# Altium PCB EMIA_HM1521_NETLIST.pcbdoc (part 2 of 2)
Units mm, origin at the board's own origin, x right, y up, seen from the top; angles counter-clockwise.
Board outline 118 x 84.09 mm, 2 copper layers (Top Layer, Bottom Layer), stack 0.972 mm thick; 201 components, 147 nets, 642 pads, 379 vias.
Unrouted connection lines stored in the file: 1.
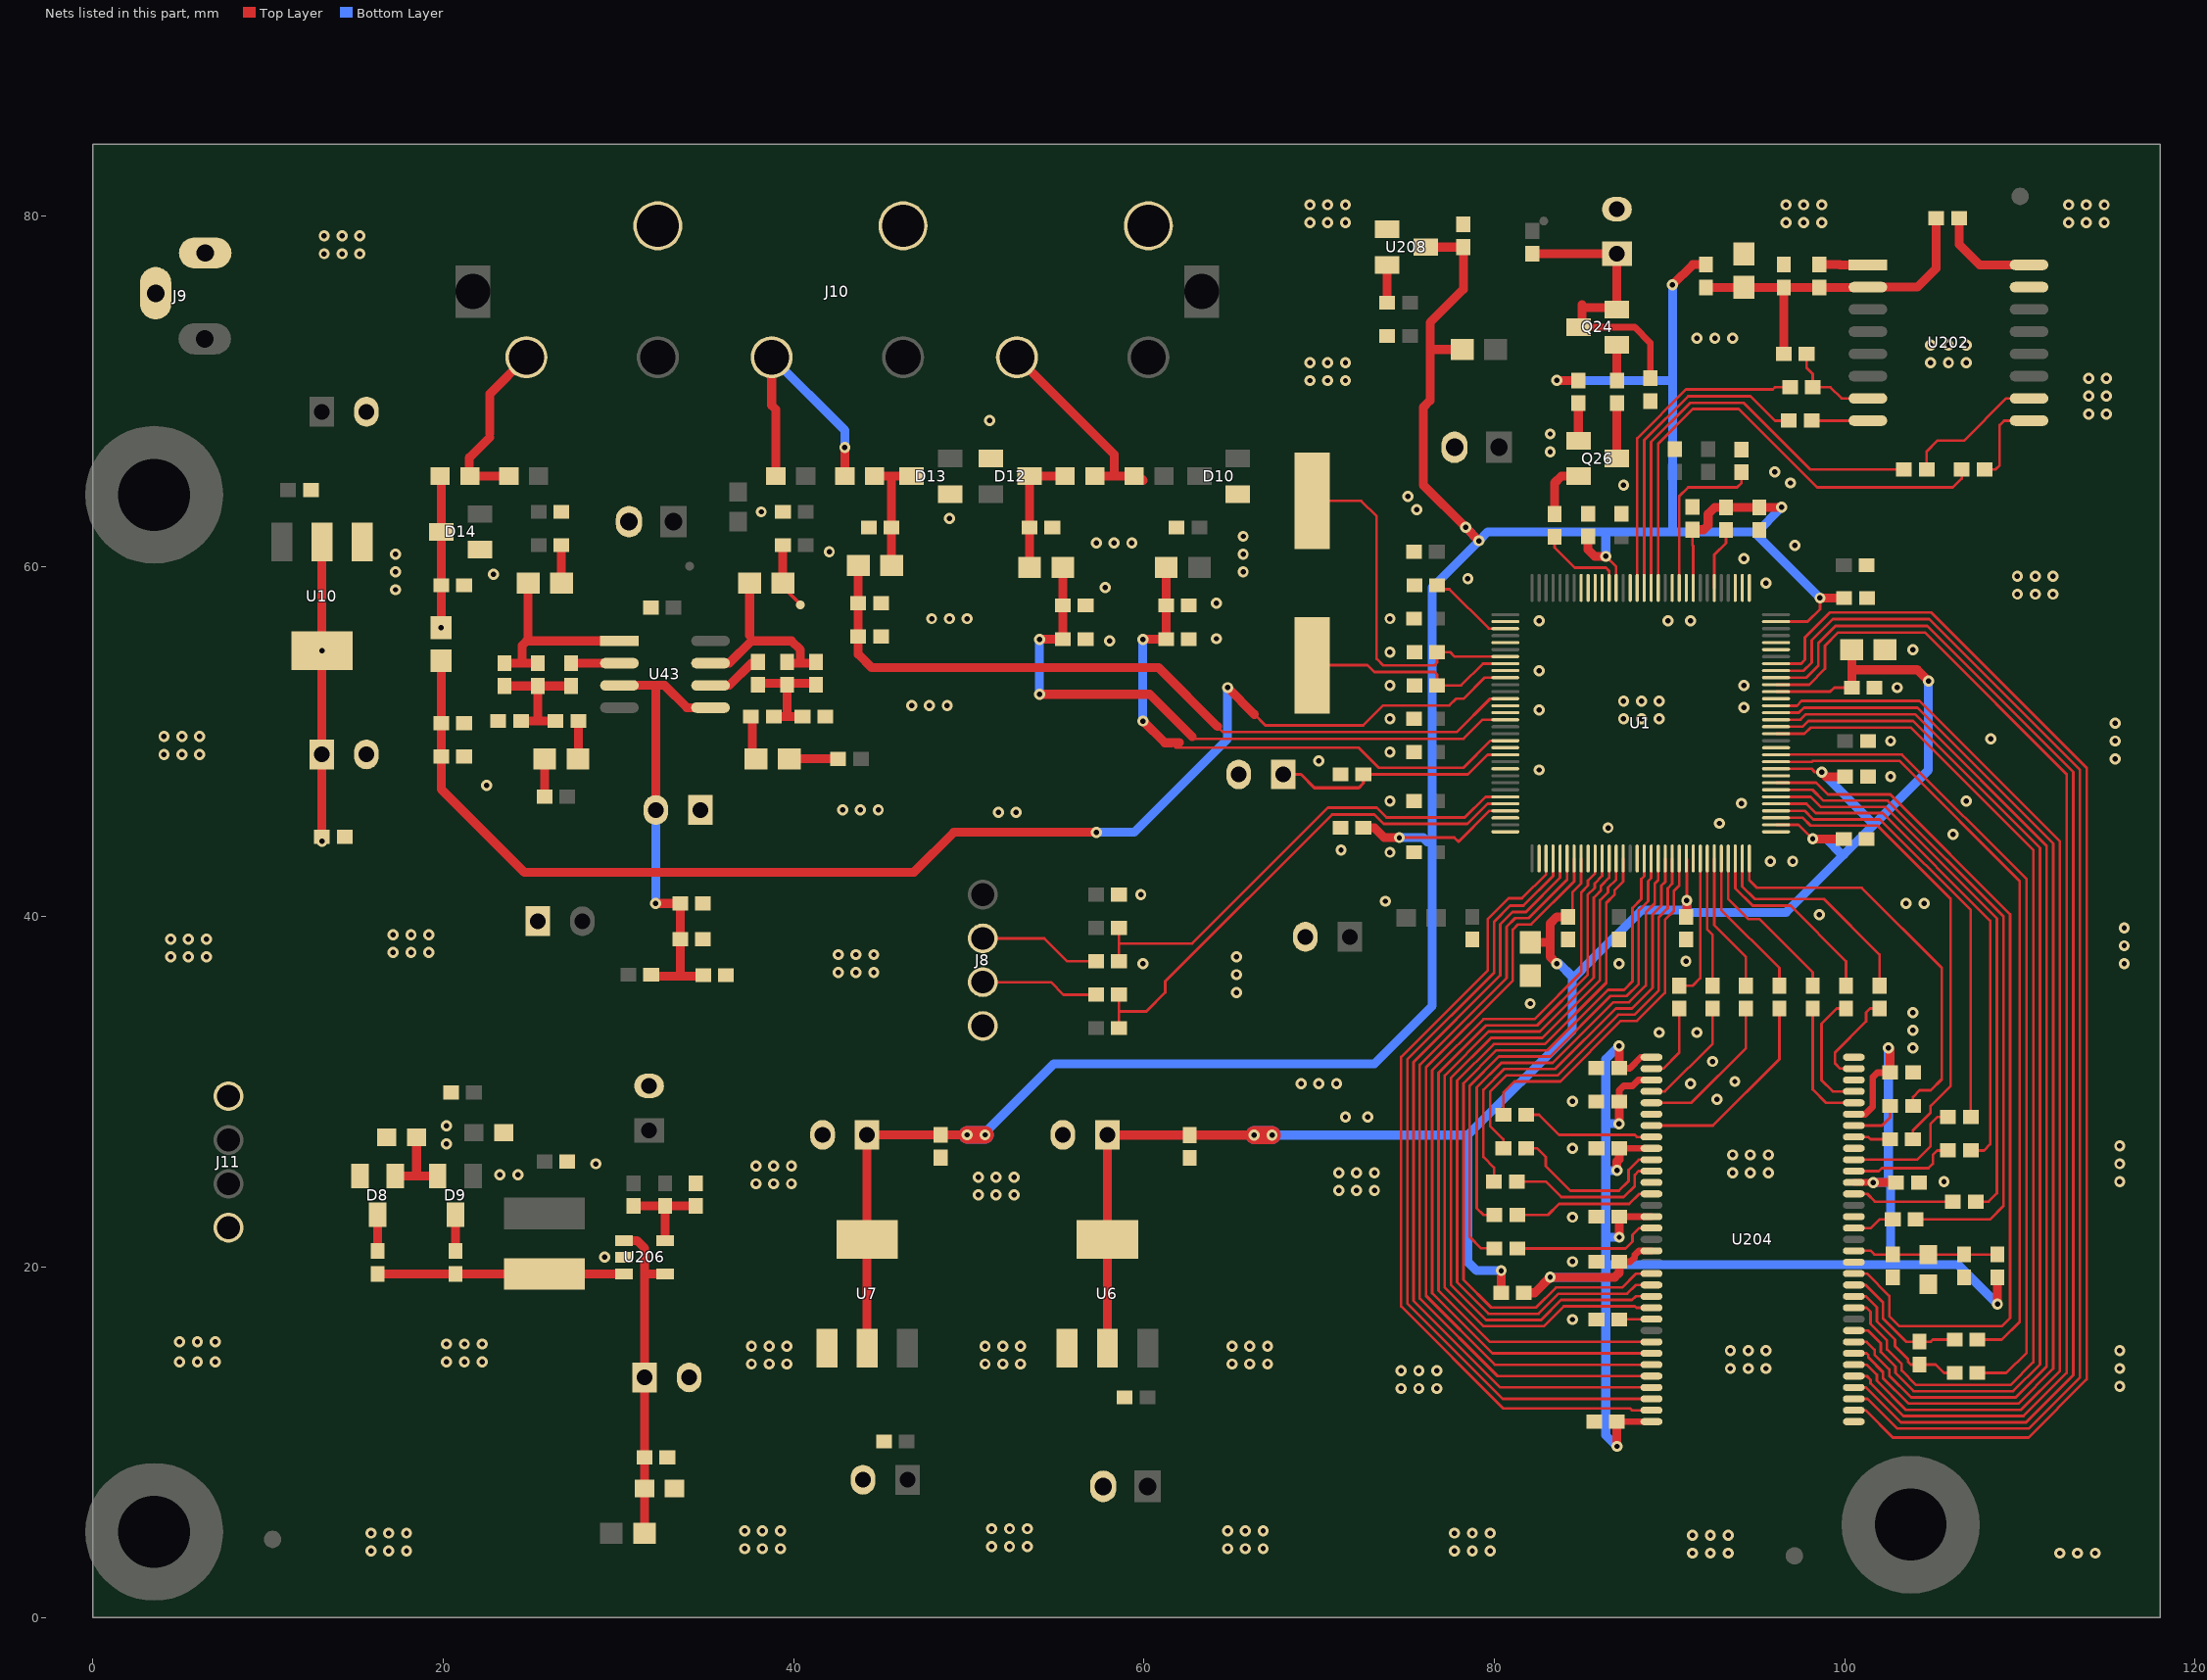
[diagram p2: the nets of this part, all layers, seen from the top]

## Via types
v1: diameter 0.635, hole 0.305, Top Layer to Bottom Layer, 379 vias

## Nets (pads, with @x,y where several pads share a name; then routed paths per layer and width w, separated by ;. In a path a pad name is that pad's centre, name@x,y a point inside that pad or via, vN(x,y) a via of type N, cw(c..) or ccw(c..) an arc to the next point about the centre after c; other vN are vias at no path point) (continued)
D2V5: C11.2 C31.2 C32.2 C33.2 C53.2 C67.2 C73.2 C1327.1 C1328.1 L18.2 U1.8 U1.23 U1.34 U1.42 U1.53 U6.2 U6.4 | length 125.4
  Top Layer w0.152: C11.2@84.455,40.137 84.455,41.402 84.951,41.898 U1.8@84.951,43.33 ; U1.23@90.951,43.33 90.982,43.299 90.982,40.946 v1(90.983,40.945) ; U1.34@96.076,45.255 97.366,45.255 v1(98.171,44.45) ; U1.42@96.076,48.455 98.103,48.455 98.298,48.26 v1(98.679,48.26) ; U1.53@96.076,52.855 99.164,52.855 99.395,53.086 C53.2@100.396,53.086
  Top Layer w0.508: U6.2@57.912,15.619 C1327.1@57.912,27.559 57.926,27.545 C1328.1@62.611,27.545 v1(66.294,27.545) ; L18.2@80.386,18.542 80.391,18.547 v1(80.391,19.812) ; C67.2@82.042,38.542 83.185,38.542 ; v1(83.566,37.338) 83.185,37.719 83.185,38.542 ; C11.2@84.201,40.01 83.571,40.01 83.185,39.624 83.185,38.542 ; C31.2@90.932,39.86 C31.2@90.932,40.01 ; C31.2@90.951,40.01 90.983,40.041 v1(90.983,40.945) ; v1(98.171,44.45) C32.2@99.944,44.45 ; v1(98.679,48.26) 98.678,48.261 v1(98.679,48.26) 98.933,48.006 C33.2@100.027,48.006 C33.2@100.071,48.006 ; C53.2@100.396,53.086 100.396,54.102 ; C73.2@100.396,55.245 100.396,54.102 ; v1(104.775,53.467) 104.14,54.102 100.396,54.102
  Top Layer w1.016: v1(66.294,27.545) v1(67.31,27.545)
  Bottom Layer w0.508: v1(67.31,27.545) 78.486,27.545 ; v1(80.391,19.812) 78.994,19.812 78.486,20.32 78.486,27.545 ; v1(83.566,37.338) 83.693,37.338 84.443,36.588 ; v1(90.983,40.945) 90.983,40.418 90.951,40.386 ; v1(98.171,44.45) 98.933,44.45 99.822,43.561 99.949,43.561 ; v1(98.679,48.26) 101.663,45.276 ; v1(104.775,53.467) 104.775,48.387 101.663,45.276 ; 78.486,27.545 84.455,33.514 84.455,36.449 85.586,37.58 88.392,40.386 90.951,40.386 ; 90.951,40.386 90.951,40.259 96.647,40.259 99.949,43.561 ; 99.949,43.561 101.663,45.276
  Bottom Layer w1.016: v1(66.294,27.545) v1(67.31,27.545)
D3V3: C30.2 C35.2 C37.2 C40.2 C46.2 C59.2 C76.1 C98.1 L8.1 L17.1 R65.2 R139.2 U1.63 U1.73 U1.84 U1.125 U7.2 U7.4 U208.3 | length 178.2
  Top Layer w0.152: v1(74.574,44.526) 77.713,44.526 77.947,44.292 79.71,46.055 U1.125@80.626,46.055 ; v1(86.36,60.579) 86.951,59.988 U1.84@86.951,58.78 ; C35.2@91.313,62.098 91.313,61.214 91.351,61.176 U1.73@91.351,58.78 ; U1.63@96.076,56.855 97.876,56.855 98.588,57.567 v1(98.588,58.202)
  Top Layer w0.508: U7.2@44.196,15.365 C98.1@44.196,27.559 C76.1@48.387,27.559 v1(49.911,27.559) ; C46.2@72.776,45.085 73.152,45.085 73.711,44.526 v1(74.574,44.526) ; U208.3@76.329,78.232 C59.2@78.232,78.232 78.232,75.819 76.327,73.914 76.327,72.39 ; L17.1@77.978,72.39 76.327,72.39 ; v1(79.121,61.468) v1(78.359,62.23) 75.946,64.643 75.946,69.088 76.327,69.469 76.327,72.39 ; v1(83.556,70.617) R139.2@84.795,70.617 ; C30.2@85.344,61.717 85.344,60.96 85.725,60.579 v1(86.36,60.579) ; v1(90.17,76.073) 91.33,77.233 L8.1@92.075,77.233 ; C35.2@91.313,62.098 91.943,62.098 92.202,62.357 92.202,62.992 92.588,63.378 R65.2@93.218,63.378 C40.2@95.123,63.378 v1(96.398,63.378) ; v1(98.588,58.202) C37.2@99.965,58.202 C37.2@100.034,58.202
  Top Layer w1.016: v1(49.911,27.559) v1(50.927,27.559)
  Bottom Layer w0.178: 86.446,61.935 86.487,61.976
  Bottom Layer w0.508: v1@50.8,27.559 54.864,31.623 73.152,31.623 76.454,34.925 76.454,44.577 ; v1(74.574,44.526) 75.935,44.526 76.169,44.292 76.454,44.577 ; v1(78.359,62.23) v1(79.121,61.468) ; v1(83.556,70.617) 90.17,70.617 ; v1(86.36,60.579) 86.36,61.976 ; v1(90.17,76.073) 90.17,70.617 ; 94.813,61.976 90.17,61.976 ; v1(96.398,63.378) 94.905,61.885 v1(98.588,58.202) ; 76.454,44.577 76.454,58.801 v1(79.121,61.468) ; v1(79.121,61.468) 79.629,61.976 86.36,61.976 ; 86.36,61.976 86.487,61.976 90.17,61.976 ; 90.17,61.976 90.17,70.617
  Bottom Layer w1.016: v1(49.911,27.559) 50.8,27.559 v1(50.927,27.559)
D3V3_T: C83.1 C104.1 U10.2 U10.4 | length 16.8
  Top Layer w0.508: C83.1@13.081,44.577 U10.2@13.081,61.343
  other v1: 13.081,44.323 13.081,55.193
DDR_A0: U1.6 U204.29 | length 44.1
  Top Layer w0.152: U1.6@84.151,43.33 84.151,42.13 81.95,39.929 81.188,39.929 80.696,39.436 80.696,36.515 75.743,31.562 75.743,18.227 80.18,13.79 U204.29@88.967,13.79
DDR_A1: U1.5 U204.30 | length 44.8
  Top Layer w0.152: U1.5@83.751,43.33 83.751,42.232 81.803,40.284 81.041,40.284 80.34,39.583 80.34,36.662 75.387,31.709 75.387,18.08 80.327,13.14 U204.30@88.967,13.14
DDR_A2: U1.4 U204.31 | length 45.5
  Top Layer w0.152: U1.4@83.351,43.33 83.351,42.335 81.656,40.64 80.894,40.64 79.985,39.731 79.985,36.81 75.032,31.857 75.032,17.932 80.474,12.49 U204.31@88.967,12.49
DDR_A3: U1.3 U204.32 | length 46.2
  Top Layer w0.152: U1.3@82.951,43.33 82.951,42.438 81.574,41.061 80.812,41.061 79.629,39.878 79.629,36.957 74.676,32.004 74.676,17.78 80.518,11.938 87.757,11.938 87.855,11.84 U204.32@88.967,11.84
DDR_A4: U1.57 U204.35 | length 73.6
  Top Layer w0.152: U1.57@96.076,54.455 97.513,54.455 97.729,54.672 97.729,55.948 99.156,57.374 104.946,57.374 113.806,48.514 113.806,13.603 110.49,10.287 102.743,10.287 101.19,11.84 U204.35@100.517,11.84
DDR_A5: U1.56 U204.36 | length 72.4
  Top Layer w0.152: U1.56@96.076,54.055 97.652,54.055 98.11,54.514 98.11,55.79 99.314,56.993 104.824,56.993 113.425,48.392 113.425,13.725 110.495,10.795 102.997,10.795 101.302,12.49 U204.36@100.517,12.49
DDR_A6: U1.55 U204.37 | length 71.3
  Top Layer w0.152: U1.55@96.076,53.655 97.812,53.655 98.491,54.334 98.491,55.632 99.472,56.612 104.702,56.612 113.044,48.27 113.044,13.847 110.348,11.151 103.197,11.151 101.208,13.14 U204.37@100.517,13.14
DDR_A7: U1.54 U204.38 | length 70.3
  Top Layer w0.152: U1.54@96.076,53.255 97.964,53.255 98.872,54.164 98.872,55.474 99.63,56.231 104.58,56.231 112.663,48.148 112.663,13.969 110.201,11.506 103.344,11.506 101.473,13.378 101.473,13.578 101.261,13.79 U204.38@100.517,13.79
DDR_A8: U1.51 U204.39 | length 63.8
  Top Layer w0.152: U1.51@96.076,52.055 97.267,52.055 97.536,52.324 104.267,52.324 112.282,44.309 112.282,14.091 110.053,11.862 103.492,11.862 101.829,13.525 101.829,13.868 101.257,14.44 U204.39@100.517,14.44
DDR_A9: U1.50 U204.40 | length 62.8
  Top Layer w0.152: U1.50@96.076,51.655 97.375,51.655 97.663,51.943 104.145,51.943 111.901,44.187 111.901,14.213 109.906,12.217 103.639,12.217 102.184,13.672 102.184,14.016 101.346,14.854 101.346,14.986 101.242,15.09 U204.40@100.517,15.09
DDR_A10: U1.7 U204.28 | length 43.4
  Top Layer w0.152: U1.7@84.551,43.33 84.551,42.026 82.098,39.573 81.356,39.573 81.051,39.268 81.051,36.368 76.098,31.415 76.098,18.374 80.033,14.44 U204.28@88.967,14.44
DDR_A11: U1.49 U204.41 | length 61.5
  Top Layer w0.152: U1.49@96.351,51.255 97.478,51.255 97.785,51.562 104.023,51.562 111.52,44.065 111.52,14.335 109.759,12.573 103.786,12.573 102.54,13.82 102.54,14.163 101.702,15.001 101.702,15.285 101.247,15.74 U204.41@100.517,15.74
DDR_A12: U1.48 U204.42 | length 60.9
  Top Layer w0.152: U1.48@96.076,50.855 97.591,50.855 97.917,51.181 103.901,51.181 111.139,43.943 111.139,14.456 109.611,12.929 103.934,12.929 102.895,13.967 102.895,14.326 102.057,15.164 102.057,15.662 101.329,16.39 U204.42@100.517,16.39
DDR_BA0: U1.11 U204.26 | length 43.6
  Top Layer w0.152: U1.11@86.151,43.33 86.151,42.336 85.725,41.91 85.725,41.656 85.319,41.25 85.319,36.683 82.443,33.807 79.522,33.807 76.81,31.095 76.81,18.669 79.738,15.74 U204.26@88.967,15.74
DDR_BA1: U1.10 U204.27 | length 44.3
  Top Layer w0.152: U1.10@85.751,43.33 85.751,42.482 85.344,42.075 85.344,41.783 84.963,41.402 84.963,36.83 82.296,34.163 79.375,34.163 76.454,31.242 76.454,18.522 79.886,15.09 U204.27@88.967,15.09
DDR_CAS: U1.13 U204.22 | length 42.8
  Top Layer w0.152: U1.13@86.951,43.33 86.951,42.13 86.487,41.666 86.487,41.402 86.03,40.945 86.03,36.388 82.738,33.096 79.817,33.096 77.521,30.8 77.521,18.994 79.522,16.993 82.668,16.993 83.811,18.136 87.859,18.136 88.063,18.34 U204.22@88.967,18.34
DDR_CKE: U1.47 U204.44 | length 60.5
  Top Layer w0.152: U1.47@96.076,50.455 97.699,50.455 98.044,50.8 103.779,50.8 110.758,43.821 110.758,14.578 109.464,13.284 104.081,13.284 103.251,14.114 103.251,14.473 102.413,15.311 102.413,15.824 101.473,16.764 101.473,17.464 101.247,17.69 U204.44@100.517,17.69
DDR_CKN: R98.2 U1.43 | length 44.7
  Top Layer w0.152: U1.43@96.076,48.855 98.131,48.855 98.184,48.908 103.111,48.908 109.982,42.037 109.982,16.891 108.966,15.875 R98.2@107.574,15.875
DDR_CKP: R99.2 U1.44 | length 47.3
  Top Layer w0.152: U1.44@96.351,49.255 96.359,49.263 103.264,49.263 110.377,42.15 110.377,15.127 109.22,13.97 R99.2@107.574,13.97
DDR_D0: R68.2 U1.25 | length 8.2
  Top Layer w0.152: R68.2@90.551,36.073 91.318,36.073 91.751,36.506 U1.25@91.751,43.33
DDR_D1: R69.2 U1.26 | length 7.4
  Top Layer w0.152: U1.26@92.151,43.33 92.151,39.281 92.456,38.977 R69.2@92.456,36.073
DDR_D2: R70.2 U1.27 | length 8
  Top Layer w0.152: U1.27@92.551,43.33 92.551,39.529 94.361,37.719 R70.2@94.361,36.073
DDR_D3: R71.2 U1.28 | length 8.6
  Top Layer w0.152: U1.28@92.951,43.33 92.951,40.399 96.266,37.084 R71.2@96.266,36.073
DDR_D4: R67.2 U1.22 | length 20.9
  Top Layer w0.152: R67.2@80.513,28.702 80.513,29.967 81.153,30.607 83.769,30.607 87.223,34.062 88.138,34.062 89.738,35.662 89.738,39.837 90.246,40.345 90.246,41.478 90.551,41.783 U1.22@90.551,43.33
DDR_D5: R66.2 U1.21 | length 23.4
  Top Layer w0.152: R66.2@80.513,26.797 80.513,27.31 79.756,28.067 79.756,30.018 80.701,30.963 83.622,30.963 87.076,34.417 87.991,34.417 89.383,35.809 89.383,39.985 89.891,40.493 89.891,41.631 90.151,41.891 U1.21@90.151,43.33
DDR_D6: R62.2 U1.20 | length 25.2
  Top Layer w0.152: R62.2@79.98,24.892 79.98,25.684 79.375,26.289 79.375,30.14 80.553,31.318 83.474,31.318 86.929,34.773 87.843,34.773 89.027,35.956 89.027,40.132 89.535,40.64 89.535,41.783 89.75,41.998 89.75,43.329 U1.20@89.751,43.33
DDR_D7: R56.2 U1.19 | length 27.7
  Top Layer w0.152: R56.2@80.005,22.987 79.375,22.987 78.994,23.368 78.994,30.262 80.406,31.674 83.327,31.674 86.782,35.128 87.696,35.128 88.646,36.078 88.646,40.259 89.154,40.767 89.154,41.91 89.351,42.107 U1.19@89.351,43.33
DDR_D8: R79.2 U1.38 | length 32.6
  Top Layer w0.152: U1.38@96.076,46.855 98.052,46.855 98.628,46.279 102.306,46.279 108.679,39.906 108.679,24.224 108.204,23.749 R79.2@107.472,23.749
DDR_D9: R78.2 U1.37 | length 29
  Top Layer w0.152: U1.37@96.076,46.455 97.817,46.455 98.349,45.923 102.159,45.923 108.301,39.781 108.301,27.021 107.95,26.67 R78.2@107.193,26.67
DDR_D10: R77.2 U1.36 | length 25.3
  Top Layer w0.152: U1.36@96.076,46.055 97.709,46.055 98.196,45.568 102.006,45.568 107.193,40.381 R77.2@107.193,28.575
DDR_D11: R76.2 U1.35 | length 26.5
  Top Layer w0.152: U1.35@96.076,45.655 97.601,45.655 98.044,45.212 101.854,45.212 106.045,41.021 106.045,30.353 104.902,29.21 104.902,28.829 103.886,27.813 R76.2@103.886,27.305
DDR_D12: R75.2 U1.32 | length 23.2
  Top Layer w0.152: U1.32@94.551,43.33 94.551,42.101 94.996,41.656 100.965,41.656 105.537,37.084 105.537,30.734 104.902,30.099 104.267,30.099 103.891,29.723 R75.2@103.891,29.21
DDR_D13: R72.2 U1.29 | length 9.6
  Top Layer w0.152: U1.29@93.351,43.33 93.351,41.015 94.488,39.878 95.123,39.878 98.171,36.83 R72.2@98.171,36.073
DDR_D14: R73.2 U1.30 | length 11.1
  Top Layer w0.152: U1.30@93.751,43.33 93.751,41.631 94.744,40.638 96.903,40.638 100.076,37.465 R73.2@100.076,36.073
DDR_D15: R74.2 U1.31 | length 12.8
  Top Layer w0.152: U1.31@94.151,43.33 94.151,41.739 94.869,41.021 98.806,41.021 101.981,37.846 R74.2@101.981,36.073
DDR_DM0: U1.17 U204.20 | length 42.8
  Top Layer w0.152: U1.17@88.551,43.33 88.551,42.323 88.392,42.164 88.392,41.021 87.884,40.513 87.884,36.322 87.402,35.84 86.487,35.84 83.032,32.385 80.111,32.385 78.232,30.506 78.232,19.289 79.817,17.704 82.374,17.704 83.517,18.847 87.3,18.847 88.093,19.64 U204.20@88.967,19.64
DDR_DM1: U1.40 U204.47 | length 50.6
  Top Layer w0.152: U1.40@96.076,47.655 98.368,47.655 99.033,46.99 102.601,46.99 109.441,40.15 109.441,17.112 108.966,16.637 103.114,16.637 102.54,17.211 102.54,18.364 101.264,19.64 U204.47@100.517,19.64
DDR_DQS0: R100.2 U1.18 | length 29.5
  Top Layer w0.152: R100.2@80.005,21.082 79.248,21.082 78.588,21.742 78.588,30.358 80.259,32.029 83.18,32.029 86.634,35.484 87.549,35.484 88.24,36.175 88.24,40.366 88.773,40.899 88.773,42.037 88.951,42.215 U1.18@88.951,43.055
DDR_DQS1: R55.2 U1.39 | length 37.8
  Top Layer w0.152: U1.39@96.076,47.255 98.155,47.255 98.775,46.634 102.453,46.634 109.06,40.028 109.06,23.495 108.298,22.733 R55.2@104.043,22.733
DDR_RAS: U1.12 U204.23 | length 43.3
  Top Layer w0.152: U1.12@86.551,43.33 86.551,42.233 86.081,41.763 86.081,41.509 85.979,41.407 85.979,41.402 85.674,41.097 85.674,36.535 82.591,33.452 79.67,33.452 77.165,30.947 77.165,18.847 79.375,16.637 82.816,16.637 83.959,17.78 88.011,17.78 88.101,17.69 U204.23@88.967,17.69
DDR_WE: U1.14 U204.21 | length 42.3
  Top Layer w0.152: U1.14@87.351,43.33 87.351,42.012 86.868,41.529 86.868,41.28 86.385,40.798 86.385,36.241 82.885,32.741 79.964,32.741 77.876,30.653 77.876,19.141 79.67,17.348 82.521,17.348 83.664,18.491 87.579,18.491 88.078,18.99 U204.21@88.967,18.99
DR_CKN: R98.1 R109.2 U204.46 | length 7.7
  Top Layer w0.152: U204.46@100.517,18.99 101.199,18.99 102.184,18.005 102.184,17.064 103.495,15.753 R109.2@104.267,15.753 104.907,15.753 105.029,15.875 R98.1@106.274,15.875
DR_CKP: R99.1 R109.1 U204.45 | length 8.4
  Top Layer w0.152: U204.45@100.517,18.34 101.209,18.34 101.829,17.721 101.829,16.916 102.87,15.875 102.87,15.494 103.607,14.757 103.607,14.605 103.759,14.453 R109.1@104.267,14.453 105.181,14.453 105.664,13.97 R99.1@106.274,13.97
DR_D0: R68.1 U204.2 | length 4.5
  Top Layer w0.152: U204.2@88.967,31.34 89.633,31.34 90.551,32.258 R68.1@90.551,34.773
DR_D1: R69.1 U204.4 | length 6.6
  Top Layer w0.152: U204.4@88.967,30.04 89.73,30.04 92.456,32.766 R69.1@92.456,34.773
DR_D2: R70.1 U204.5 | length 9.2
  Top Layer w0.152: U204.5@88.967,29.39 91.239,29.39 94.361,32.512 R70.1@94.361,34.773 R70.1@94.361,35.064
DR_D3: R71.1 U204.7 | length 11.8
  Top Layer w0.152: U204.7@88.967,28.09 92.479,28.09 96.266,31.877 R71.1@96.266,34.773
DR_D4: R67.1 U204.8 | length 7.7
  Top Layer w0.152: R67.1@81.813,28.702 82.55,28.702 83.693,27.559 88.011,27.559 88.13,27.44 U204.8@88.967,27.44
DR_D5: R66.1 U204.10 | length 9.6
  Top Layer w0.152: R66.1@81.813,26.797 82.423,26.797 82.931,26.289 82.931,25.781 84.341,24.371 87.109,24.371 87.655,24.917 87.655,25.552 88.243,26.14 U204.10@88.967,26.14
DR_D6: R62.1 U204.11 | length 9
  Top Layer w0.152: R62.1@81.28,24.892 82.931,24.892 83.82,24.003 87.376,24.003 88.011,24.638 88.011,25.273 88.228,25.49 U204.11@88.967,25.49
DR_D7: R56.1 U204.13 | length 8.2
  Top Layer w0.152: R56.1@81.305,22.987 83.058,22.987 83.693,23.622 87.697,23.622 88.265,24.19 U204.13@88.967,24.19
DR_D8: R79.1 U204.54 | length 5.8
  Top Layer w0.152: U204.54@100.517,24.19 101.286,24.19 101.727,23.749 R79.1@106.172,23.749
DR_D9: R78.1 U204.56 | length 7.6
  Top Layer w0.152: R78.1@105.893,26.67 105.283,26.67 105.029,26.416 105.029,25.908 104.775,25.654 102.108,25.654 101.944,25.49 ; 101.944,25.49 U204.56@100.517,25.49 101.944,25.49
DR_D10: R77.1 U204.57 | length 7.1
  Top Layer w0.152: U204.57@100.517,26.14 104.118,26.14 104.902,26.924 104.902,28.194 105.283,28.575 R77.1@105.893,28.575
DR_D11: R76.1 U204.59 | length 2.1
  Top Layer w0.152: U204.59@100.517,27.44 101.338,27.44 101.473,27.305 R76.1@102.586,27.305
DR_D12: R75.1 U204.60 | length 2.9
  Top Layer w0.178: U204.60@100.517,28.09 102.131,28.09 102.591,28.55 R75.1@102.591,29.21
DR_D13: R72.1 U204.62 | length 7.3
  Top Layer w0.152: R72.1@98.171,34.773 98.171,30.152 98.933,29.39 U204.62@100.517,29.39
DR_D14: R73.1 U204.63 | length 7.1
  Top Layer w0.152: R73.1@100.076,34.773 99.543,34.773 98.679,33.909 98.679,30.675 99.314,30.04 U204.63@100.517,30.04
DR_D15: R74.1 U204.65 | length 5.7
  Top Layer w0.152: U204.65@100.517,31.34 99.746,31.34 99.441,31.645 99.441,32.258 101.219,34.036 101.219,34.544 101.448,34.773 R74.1@101.981,34.773
DR_DQS0: R100.1 U204.16 | length 8.4
  Top Layer w0.152: R100.1@81.305,21.069 87.49,21.069 87.884,21.463 87.884,21.844 88.28,22.24 U204.16@88.967,22.24
DR_DQS1: R55.1 U204.51 | length 2.4
  Top Layer w0.152: U204.51@100.517,22.24 101.488,22.24 101.981,22.733 R55.1@102.743,22.733
GND: C5.1 C6.1 C11.1 C13.2 C14.2 C15.1 C24.2 C25.2 C26.2 C27.2 C28.2 C29.1 C30.1 C31.1 C32.1 C33.1 C34.1 C35.1 C37.1 C38.1 C40.1 C41.1 C42.1 C43.1 C45.2 C46.1 C47.2 C49.2 C50.2 C53.1 C54.1 C55.1 C56.2 C57.1 C58.1 C59.1 C60.2 C61.1 C63.1 C64.1 C65.2 C67.1 C70.1 C71.2 C72.2 C73.1 C74.2 C75.1 C76.2 C78.2 C83.2 C84.1 C85.1 C86.1 C87.1 C88.1 C89.1 C90.1 C98.2 C99.2 C100.2 C101.2 C102.2 C104.2 C105.1 C107.1 C116.1 C117.1 C251.1 C270.2 C271.2 C273.1 C275.2 C276.2 C343.2 C1327.2 C1328.2 C1333.2 C1334.2 CE1.2 CE2.2 CE5.2 D8.2 D10.1 D12.1 D13.1 D14.1 J8.4 J9.2 J9.3 J10.3 J10.6 J10.9 J11.1 J11.4 R48.1 R54.1 R57.1 R59.1 R60.1 R64.2 R80.1 R83.2 R91.1 R117.1 R161.1 R181.1 R182.1 U1.2 U1.9 U1.16 U1.24 U1.33 U1.41 U1.45 U1.52 U1.65 U1.74 U1.76 U1.82 U1.98 U1.101 U1.105 U1.110 U1.111 U1.116 U1.119 U1.126 U1.128 U6.1 U7.1 U10.1 U202.15 U204.6 U204.12 U204.34 U204.48 U204.52 U204.58 U204.64 U204.66 U206.2 U208.1
  other v1: 91.313,3.683 92.329,3.683 93.345,3.683 112.268,3.683 113.284,3.683 114.3,3.683 15.875,3.81 16.891,3.81 17.907,3.81 77.724,3.81 78.74,3.81 79.756,3.81 37.211,3.937 38.227,3.937 39.243,3.937 64.77,3.937 65.786,3.937 66.802,3.937 51.308,4.064 52.324,4.064 53.34,4.064 91.313,4.699 92.329,4.699 93.345,4.699 15.875,4.826 16.891,4.826 17.907,4.826 77.724,4.826 78.74,4.826 79.756,4.826 37.211,4.953 38.227,4.953 39.243,4.953 64.77,4.953 65.786,4.953 66.802,4.953 51.308,5.08 52.324,5.08 53.34,5.08 74.676,13.081 75.692,13.081 76.708,13.081 115.697,13.208 74.676,14.097 75.692,14.097 76.708,14.097 93.472,14.224 94.488,14.224 95.504,14.224 115.697,14.224 37.592,14.478 38.608,14.478 39.624,14.478 50.927,14.478 51.943,14.478 52.959,14.478 65.024,14.478 66.04,14.478 67.056,14.478 4.953,14.605 5.969,14.605 6.985,14.605 20.193,14.605 21.209,14.605 22.225,14.605 93.472,15.24 94.488,15.24 95.504,15.24 115.697,15.24 37.592,15.494 38.608,15.494 39.624,15.494 50.927,15.494 51.943,15.494 52.959,15.494 65.024,15.494 66.04,15.494 67.056,15.494 20.193,15.621 21.209,15.621 22.225,15.621 4.953,15.748 5.969,15.748 6.985,15.748 84.455,17.018 84.455,20.32 29.21,20.574 84.455,22.86 50.546,24.13 51.562,24.13 52.578,24.13 71.12,24.384 72.136,24.384 73.152,24.384 37.846,24.765 38.862,24.765 39.878,24.765 105.664,24.892 115.697,24.892 50.546,25.146 51.562,25.146 52.578,25.146 23.241,25.273 24.257,25.273 71.12,25.4 72.136,25.4 73.152,25.4 93.599,25.4 94.615,25.4 95.631,25.4 37.846,25.781 38.862,25.781 39.878,25.781 28.702,25.908 115.697,25.908 93.599,26.416 94.615,26.416 95.631,26.416 84.455,26.797 115.697,26.924 20.193,27.051 20.193,28.067 71.501,28.575 72.771,28.575 84.455,29.464 92.71,29.591 68.961,30.48 69.977,30.48 70.993,30.48 91.186,30.48 93.726,30.607 92.456,31.75 103.886,32.512 89.408,33.401 91.567,33.401 103.886,33.528 103.886,34.544 82.042,35.052 65.278,35.687 65.278,36.703 42.545,36.83 43.561,36.83 44.577,36.83 59.944,37.338 87.122,37.338 115.951,37.338 90.932,37.465 4.445,37.719 5.461,37.719 6.477,37.719 65.278,37.719 42.545,37.846 43.561,37.846 44.577,37.846 17.145,37.973 18.161,37.973 19.177,37.973 115.951,38.354 4.445,38.735 5.461,38.735 6.477,38.735 17.145,38.989 18.161,38.989 19.177,38.989 115.951,39.37 98.552,40.132 103.505,40.767 104.521,40.767 73.787,40.894 59.817,41.275 95.758,43.18 97.028,43.18 74.041,43.688 71.247,43.815 106.172,44.704 86.487,45.085 92.837,45.339 51.689,45.974 52.705,45.974 42.799,46.101 43.815,46.101 44.831,46.101 94.107,46.482 74.041,46.609 106.934,46.609 22.479,47.498 102.616,48.006 82.55,48.387 69.977,48.895 115.443,49.022 4.064,49.276 5.08,49.276 6.096,49.276 74.041,49.403 102.616,50.038 115.443,50.038 108.331,50.165 4.064,50.292 5.08,50.292 6.096,50.292 115.443,51.054 74.041,51.308 87.376,51.308 88.392,51.308 89.408,51.308 82.55,51.816 94.234,51.943 46.736,52.07 47.752,52.07 48.768,52.07 87.376,52.324 88.392,52.324 89.408,52.324 102.997,53.086 74.041,53.213 94.234,53.213 82.55,54.055 74.041,55.118 103.886,55.245 58.039,55.753 64.135,55.88 82.55,56.896 89.916,56.896 91.186,56.896 47.879,57.023 48.895,57.023 49.911,57.023 74.041,57.023 64.135,57.912 109.855,58.42 110.871,58.42 111.887,58.42 17.272,58.674 57.785,58.801 95.504,59.055 78.486,59.309 109.855,59.436 110.871,59.436 111.887,59.436 22.86,59.563 17.272,59.69 65.659,59.69 94.234,60.452 17.272,60.706 65.659,60.706 42.037,60.833 97.155,61.214 57.277,61.341 58.293,61.341 59.309,61.341 65.659,61.722 48.895,62.738 38.151,63.119 75.565,63.246 75.057,64.008 87.376,64.643 96.901,64.77 96.012,65.405 83.185,66.548 83.185,67.564 51.181,68.326 113.919,68.707 114.935,68.707 113.919,69.723 114.935,69.723 69.469,70.612 70.485,70.612 71.501,70.612 113.919,70.739 114.935,70.739 69.469,71.628 70.485,71.628 71.501,71.628 104.902,71.628 105.918,71.628 106.934,71.628 104.902,72.644 105.918,72.644 106.934,72.644 91.567,73.025 92.583,73.025 93.599,73.025 13.208,77.851 14.224,77.851 15.24,77.851 13.208,78.867 14.224,78.867 15.24,78.867 69.469,79.629 70.485,79.629 71.501,79.629 96.647,79.629 97.663,79.629 98.679,79.629 112.776,79.629 113.792,79.629 114.808,79.629 69.469,80.645 70.485,80.645 71.501,80.645 96.647,80.645 97.663,80.645 98.679,80.645 112.776,80.645 113.792,80.645 114.808,80.645
GPIO14: R65.1 U1.70 | length 3.7
  Top Layer w0.152: U1.70@92.551,58.78 92.551,60.674 93.218,61.341 R65.1@93.218,62.078 R65.1@93.066,62.078
NetC6_2: C6.2 CE2.1 U1.117 | length 14.1
  Top Layer w0.152: C6.2@72.522,48.133 78.486,48.133 79.608,49.255 U1.117@80.626,49.255
  Top Layer w0.178: CE2.1@67.945,48.133 68.961,48.133 69.723,47.371 72.263,47.371 72.522,47.63 C6.2@72.522,48.133
NetC13_1: C13.1 U1.103 Y1.2 | length 20.5
  Top Layer w0.152: Y1.2@69.596,63.745 72.399,63.745 73.279,62.865 73.279,54.737 73.66,54.356 76.581,54.356 76.733,54.508 C13.1@76.733,55.118 77.47,55.118 77.733,54.855 U1.103@80.626,54.855
NetC14_1: C14.1 U1.104 Y1.1 | length 12.4
  Top Layer w0.152: Y1.1@69.596,54.365 72.762,54.365 73.152,53.975 76.581,53.975 76.733,53.823 C14.1@76.733,53.213 78.105,53.213 79.347,54.455 U1.104@80.626,54.455
NetC15_2: C15.2 C18.1 R86.1 R96.1 R184.2 | length 8
  Top Layer w0.508: C18.1@23.495,53.183 R96.1@25.402,53.183 ; C15.2@24.389,51.181 C15.2@24.439,51.181 25.402,51.181 ; R86.1@26.416,51.181 25.402,51.181 ; R184.2@27.432,53.183 R184.2@27.305,53.183 R96.1@25.402,53.183 ; 25.402,51.181 R96.1@25.402,53.183
NetC17_1: C17.1 C75.2 R85.2 R95.1 R183.1 | length 6.9
  Top Layer w0.508: R183.1@37.973,53.34 R95.1@39.624,53.34 ; R85.2@38.799,51.435 C75.2@40.577,51.435 ; 39.624,51.499 R95.1@39.624,53.34 ; C17.1@41.275,53.341 41.274,53.34 R95.1@39.624,53.34
NetC17_2: C17.2 C94.1 R95.2 U43.7 | length 11.1
  Top Layer w0.508: U43.7@35.433,54.483 36.322,54.483 37.592,55.753 39.878,55.753 40.386,55.245 40.386,54.483 ; 37.489,56.07 C94.1@37.489,59.055 ; R95.2@39.624,54.483 40.386,54.483 ; C17.2@41.275,54.484 41.274,54.483 40.386,54.483
NetC18_2: C18.2 C95.1 R96.2 U43.1 | length 11.4
  Top Layer w0.508: C18.2@23.495,54.483 24.511,54.483 ; C95.1@24.849,59.055 24.849,55.753 ; R96.2@25.146,54.483 24.511,54.483 ; U43.1@29.883,55.753 24.849,55.753 ; 24.511,54.483 24.511,55.499 24.765,55.753 24.849,55.753
NetC56_1: C56.1 D8.1 D9.2 | length 4.6
  Top Layer w0.508: D8.1@17.272,25.214 18.478,25.214 ; C56.1@18.478,27.416 18.478,25.214 ; D9.2@19.685,25.214 18.478,25.214
NetC91_1: C91.1 R189.2 | length 2.7
  Top Layer w0.508: C91.1@39.942,49.022 R189.2@42.609,49.022
NetC91_2: C91.2 R85.1 | length 2.4
  Top Layer w0.508: C91.2@37.656,49.022 R85.1@37.656,51.435
NetC92_1: C92.1 R190.1 | length 2.2
  Top Layer w0.508: R190.1@25.786,46.863 C92.1@25.786,49.022
NetC92_2: C92.2 R86.2 | length 2.2
  Top Layer w0.508: C92.2@27.716,49.022 R86.2@27.716,51.181
NetC94_2: C94.2 pad.TP1@40.386,57.81 R111.2 | length 3.2
  Top Layer w0.2: C94.2@39.658,58.572 pad.TP1@40.42,57.81
  Top Layer w0.508: C94.2@39.389,59.055 R111.2@39.389,61.214
NetC95_2: C95.2 R112.2 | length 2.2
  Top Layer w0.508: C95.2@26.749,59.055 R112.2@26.749,61.214
NetC116_2: C116.2 C117.2 R90.1 R91.2 U204.49 | length 8.3
  Top Layer w0.152: U204.49@100.517,20.94 101.488,20.94 101.697,20.731 C116.2@102.743,20.731 C117.2@104.775,20.731 R91.2@106.807,20.731 R90.1@108.712,20.731
NetC270_1: C270.1 C271.1 C276.1 FB3.2 U206.1 U206.4 | length 18.8
  Top Layer w0.508: U206.1@30.321,21.524 31.054,21.524 31.496,21.082 31.496,19.624 ; FB3.2@31.496,4.826 C270.1@31.496,7.366 C271.1@31.496,9.144 31.496,19.624 ; U206.4@32.671,19.624 31.496,19.624
NetC272_1: C272.1 R114.2 R117.2 U206.5 | length 5.5
  Top Layer w0.508: R114.2@30.861,23.495 R117.2@34.417,23.495 ; U206.5@32.671,21.524 C272.1@32.671,23.495
NetC1333_1: C1333.1 L10.2 Q24.2 | length 9.1
  Top Layer w0.508: L10.2@82.169,77.851 C1333.1@86.995,77.851 Q24.2@86.995,74.676 ; 85.141,74.778 86.284,74.778
NetC1340_1: C1340.1 C1341.1 L38.1 U206.3 | length 14.1
  Top Layer w0.508: C1341.1@16.256,19.624 C1340.1@20.701,19.624 U206.3@30.321,19.624
NetC1340_2: C1340.2 D9.3 | length 2.1
  Top Layer w0.508: C1340.2@20.701,20.924 D9.3@20.701,23.014
NetC1341_2: C1341.2 D8.3 | length 2.1
  Top Layer w0.508: C1341.2@16.256,20.924 D8.3@16.256,23.014
NetJ8_2: J8.2 R106.1 | length 7.1
  Top Layer w0.152: J8.2@50.8,38.775 54.316,38.775 55.626,37.465 R106.1@57.272,37.465 R106.1@57.341,37.465
NetJ8_3: J8.3 R105.2 | length 6.8
  Top Layer w0.152: J8.3@50.8,36.275 54.69,36.275 55.405,35.56 R105.2@57.272,35.56 R105.2@57.341,35.56
NetJ10_1: J10.1 R133.1 R134.1 | length 10.6
  Top Layer w0.254: R134.1@23.749,65.151 R134.1@24.13,65.151
  Top Layer w0.508: 22.662,67.381 21.488,66.207 21.488,65.166 23.734,65.166 R134.1@23.749,65.151 ; 22.662,67.589 22.662,69.856 J10.1@24.75,71.944
NetJ10_4: J10.4 R131.1 R132.1 | length 15.4
  Top Layer w0.508: J10.4@38.75,71.944 38.75,69.2 38.989,68.961 R132.1@38.989,65.151 ; R131.1@42.926,65.151 v1(42.926,66.802)
  Bottom Layer w0.508: J10.4@38.75,71.944 42.926,67.768 v1(42.926,66.802)
NetJ10_7: J10.7 R129.1 R130.1 | length 11.9
  Top Layer w0.508: J10.7@52.75,71.944 58.293,66.401 58.293,65.151 ; R129.1@57.199,65.151 58.293,65.151 ; R130.1@59.956,64.919 59.723,65.151 R130.1@59.436,65.151 58.293,65.151
NetQ24_1: Q24.1 R158.2 | length 1.8
  Top Layer w0.508: R158.2@86.995,70.549 Q24.1@86.995,72.39
NetQ26_1: Q26.1 R139.1 | length 2.1
  Top Layer w0.508: Q26.1@84.795,67.183 R139.1@84.795,69.317
NetQ26_2: Q26.2 R142.2 | length 3.3
  Top Layer w0.508: R142.2@83.439,62.997 83.439,64.77 83.82,65.151 Q26.2@84.795,65.151
NetQ26_3: Q26.3 R158.1 | length 3.1
  Top Layer w0.508: Q26.3@86.995,66.167 R158.1@86.995,69.317
NetR63_1: R63.1 U208.2 | length 1.8
  Top Layer w0.508: R63.1@73.882,75.438 U208.2@73.882,77.216
NetR64_1: R64.1 U1.99 | length 4.9
  Top Layer w0.152: R64.1@76.645,58.707 77.437,58.707 79.689,56.455 U1.99@80.626,56.455
NetR80_2: R80.2 U204.24 | length 2
  Top Layer w0.152: R80.2@86.998,17.018 R80.2@87.127,17.018 87.149,17.04 U204.24@88.967,17.04
NetR83_1: R83.1 U1.75 | length 9.7
  Top Layer w0.152: U1.75@90.551,58.78 90.551,64.008 91.059,64.516 93.853,64.516 94.107,64.77 R83.1@94.107,65.38
NetR183_2: R183.2 U43.6 | length 3.1
  Top Layer w0.508: U43.6@35.433,53.213 36.322,53.213 37.592,54.483 R183.2@37.973,54.483
NetR184_1: R184.1 U43.2 | length 2.6
  Top Layer w0.508: R184.1@27.305,54.483 U43.2@29.883,54.483
Pb: C49.1 D13.3 L3.2 R131.2 | length 7.2
  Top Layer w0.508: R131.2@44.626,65.151 45.593,65.151 ; L3.2@45.593,60.071 C49.1@45.593,62.23 45.593,65.151 ; D13.3@46.736,65.151 45.593,65.151
Pr: C101.1 D14.3 L4.2 R133.2 | length 8.8
  Top Layer w0.508: L4.2@19.89,56.322 v1(19.89,56.515) C101.1@19.89,58.928 R133.2@19.89,65.151
PWR_DRAM: C84.2 C85.2 C86.2 C87.2 C88.2 C89.2 C90.2 C105.2 L18.1 R90.2 U204.1 U204.3 U204.9 U204.15 U204.18 U204.33 U204.55 U204.61 | length 100.6
  Top Layer w0.381: C89.2@86.995,11.19 U204.33@88.967,11.19 ; C86.2@87.012,22.89 C86.2@87.127,22.89 U204.15@88.967,22.89 ; C85.2@87.122,29.464 87.122,30.099 87.376,30.353 87.884,30.353 88.221,30.69 U204.3@88.967,30.69 ; C84.2@87.122,31.369 87.731,31.369 88.352,31.99 U204.1@88.967,31.99 ; C88.2@87.127,20.32 87.757,20.32 88.011,20.574 88.011,20.701 88.25,20.94 U204.18@88.967,20.94 ; C87.2@87.127,26.797 87.127,26.79 U204.9@88.967,26.79 ; U204.55@100.517,24.84 v1(101.625,24.84) ; U204.61@100.517,28.74 101.164,28.74 101.6,29.176 101.6,30.849 101.866,31.115 C105.2@102.591,31.115
  Top Layer w0.508: L18.1@81.686,18.542 82.296,18.542 v1(83.185,19.431) 86.868,19.431 87.127,19.69 C88.2@87.127,20.32 ; v1(86.995,9.779) C89.2@86.995,11.19 ; v1(86.995,25.527) 86.995,26.035 87.127,26.167 C87.2@87.127,26.79 ; v1(87.122,28.194) C85.2@87.122,29.464 ; C84.2@87.122,31.369 v1(87.122,32.639) ; v1(87.127,21.717) C86.2@87.127,22.89 ; v1(101.625,24.84) C90.2@102.929,24.84 ; v1(102.489,32.512) 102.591,32.41 C105.2@102.591,31.115 ; v1(108.712,17.907) R90.2@108.712,19.431
  Bottom Layer w0.508: v1(83.185,19.431) 86.36,19.431 ; v1(86.995,9.779) 86.36,10.414 86.36,19.431 ; v1(86.995,25.527) 86.36,25.527 ; v1(87.122,28.194) 86.36,28.194 ; v1(87.122,32.639) 86.36,31.877 86.36,28.194 ; v1(87.127,21.717) 86.36,21.717 ; v1(101.625,24.84) 102.616,24.84 ; v1(102.489,32.512) 102.489,24.967 102.616,24.84 ; v1(108.712,17.907) 106.475,20.144 102.616,20.144 ; 86.36,19.431 86.36,20.144 ; 86.36,20.144 86.36,21.717 ; 86.36,20.144 102.616,20.144 ; 86.36,21.717 86.36,25.527 ; 86.36,25.527 86.36,28.194 ; 102.616,20.144 102.616,24.84
RXD: R103.2 R106.2 U1.123 | length 27.9
  Top Layer w0.152: R106.2@58.572,37.465 58.572,38.481 ; R103.2@58.572,39.37 58.572,38.481 ; U1.123@80.626,46.855 79.494,46.855 78.308,45.669 73.838,45.669 73.279,46.228 70.49,46.228 62.743,38.481 58.572,38.481
S_/CS: R28.1 U1.81 | length 18.5
  Top Layer w0.152: U1.81@88.151,58.78 88.151,67.323 90.932,70.104 95.885,70.104 96.012,70.231 R28.1@96.876,70.231
S_CLK: R24.2 U1.78 | length 28.9
  Top Layer w0.152: U1.78@89.351,58.78 89.351,67.009 91.328,68.986 93.955,68.986 98.425,64.516 106.172,64.516 106.68,65.024 R24.2@106.68,65.532
S_SI: R29.1 U1.80 | length 18.3
  Top Layer w0.152: U1.80@88.551,58.78 88.551,67.215 91.059,69.723 94.615,69.723 96.012,68.326 R29.1@96.812,68.326
S_SO: R25.2 U1.79 | length 25.3
  Top Layer w0.152: U1.79@88.951,58.78 88.951,67.112 91.181,69.342 94.234,69.342 98.044,65.532 R25.2@103.442,65.532
SC_CLK: U1.87
SC_DETECT: U1.89
SC_IO: U1.88
SC_RST: U1.86
SC_VCC: Q24.3 R161.2 | length 7.8
  Top Layer w0.381: Q24.3@84.795,73.66 85.014,73.66 88.011,73.66 88.9,72.771 R161.2@88.9,70.744 R161.2@88.9,70.617
  Top Layer w0.508: Q24.3@85.014,73.812 85.014,74.955
SC_VCCEN: R142.1 U1.85 | length 5.4
  Top Layer w0.152: R142.1@83.439,61.824 R142.1@83.439,61.697 83.439,61.087 84.595,59.931 86.373,59.931 86.551,59.753 U1.85@86.551,58.78
SCL: U1.66
SDA: U1.67
SFCLK: R24.1 U202.9 | length 5
  Top Layer w0.152: R24.1@107.98,65.532 108.585,65.532 108.839,65.786 108.839,68.072 109.093,68.326 U202.9@110.518,68.326
SFCS: R28.2 R37.2 U202.7 | length 5.5
  Top Layer w0.152: R37.2@97.82,72.136 97.82,71.344 98.176,70.988 R28.2@98.176,70.231 99.187,70.231 99.822,69.596 U202.7@101.318,69.596
SFHOLD: R27.2 U202.1 | length 2.8
  Top Layer w0.508: R27.2@98.552,77.233 99.712,77.233 99.695,77.216 U202.1@101.318,77.216
SFSI: R25.1 U202.10 | length 8.1
  Top Layer w0.152: R25.1@104.673,65.532 104.673,66.573 105.283,67.183 106.807,67.183 109.22,69.596 U202.10@110.518,69.596
SFSO: R29.2 U202.8 | length 3.1
  Top Layer w0.152: R29.2@98.112,68.326 U202.8@101.243,68.326
SFVCC: C251.2 CE1.1 L8.2 R27.1 R35.1 R37.1 U202.2 | length 20.3
  Top Layer w0.508: L8.2@92.075,75.933 CE1.1@94.234,75.933 C251.2@96.52,75.933 ; R37.1@96.52,72.136 C251.2@96.52,75.933 ; R35.1@105.22,79.883 105.22,77.026 104.14,75.946 101.243,75.946 101.23,75.933 R27.1@98.552,75.933 C251.2@96.52,75.933
SFWP: R35.2 U202.16 | length 6
  Top Layer w0.508: R35.2@106.52,79.883 106.52,78.392 107.696,77.216 U202.16@110.518,77.216
SPI1_CLK: U1.59
SPI1_IO0: U1.60
TXD: R105.1 R180.1 U1.124 | length 29.7
  Top Layer w0.152: R180.1@58.572,33.655 58.572,34.608 ; R105.1@58.572,35.56 58.572,34.608 ; U1.124@80.626,46.455 79.607,46.455 78.466,45.314 73.685,45.314 73.152,45.847 70.738,45.847 61.214,36.323 61.214,35.687 60.134,34.608 58.572,34.608
V_DAC0: C24.1 L1.1 R54.2 U1.115 | length 32.9
  Top Layer w0.152: 61.544,49.936 61.824,49.657 72.248,49.657 73.391,48.514 78.232,48.514 79.773,50.055 U1.115@80.626,50.055
  Top Layer w0.508: v1(59.931,55.847) R54.2@61.262,55.847 C24.1@61.262,57.785 L1.1@61.262,59.944 ; v1(59.944,51.181) 61.189,49.936 61.544,49.936 ; 61.654,49.942 62.009,49.942
  Bottom Layer w0.508: v1@59.911,51.214 v1@59.931,51.194 ; v1@59.931,51.181 v1@59.931,51.194 ; v1(59.931,55.847) v1@59.931,51.194 ; v1(59.944,51.181) v1@59.931,51.194
V_DAC1: C26.1 L2.1 R57.2 U1.112 | length 36.7
  Top Layer w0.152: 62.738,50.292 62.865,50.165 78.232,50.165 79.322,51.255 U1.112@80.626,51.255
  Top Layer w0.508: v1(54.036,52.705) 60.325,52.705 62.738,50.292 ; v1(54.036,55.847) R57.2@55.367,55.847 C26.1@55.367,57.785 L2.1@55.367,59.944
  Bottom Layer w0.508: v1(54.036,52.705) v1(54.036,55.847)
V_DAC2: C47.1 L3.1 R59.2 U1.109 | length 44.5
  Top Layer w0.152: 64.198,50.863 64.516,50.546 77.851,50.546 79.76,52.455 U1.109@80.626,52.455
  Top Layer w0.508: 43.688,54.991 44.45,54.229 60.833,54.229 64.198,50.863 ; 43.693,55.118 R59.2@43.693,56.007 C47.1@43.693,57.912 L3.1@43.693,60.071
V_DAC3: C50.1 L4.1 R60.2 U1.106 | length 78.1
  Top Layer w0.152: 66.294,51.562 66.929,50.927 72.517,50.927 73.66,52.07 77.424,52.07 77.805,52.451 78.232,52.451 79.436,53.655 U1.106@80.626,53.655
  Top Layer w0.508: L4.1@19.89,54.615 R60.2@19.89,51.059 C50.1@19.89,49.154 19.89,47.293 24.638,42.545 46.863,42.545 49.149,44.831 v1(57.277,44.831) ; v1(64.77,53.086) 66.294,51.562
  Bottom Layer w0.508: v1(57.277,44.831) 59.436,44.831 64.77,50.165 v1(64.77,53.086)
Vref: C27.1 C28.1 C34.2 R47.1 R48.2 U43.3 U43.5 | length 28.5
  Top Layer w0.508: U43.3@29.883,53.213 32.639,53.213 33.909,51.943 U43.5@35.433,51.943 ; R47.1@31.902,36.627 R48.2@34.442,36.627 ; v1(32.131,40.767) C28.1@33.528,40.767 33.528,36.652 C27.1@33.528,38.592 ; C34.2@32.131,46.101 32.131,53.213
  Bottom Layer w0.508: v1(32.131,40.767) C34.2@32.131,46.101
Y: C45.1 D12.3 L2.2 R129.2 | length 7.2
  Top Layer w0.508: L2.2@53.467,59.944 C45.1@53.467,62.23 D12.3@53.467,65.151 R129.2@55.499,65.151
pads on no net: J10.Hole M1.1 M2.1 M3.1 MI1.MI MI2.MI MI3.MI U1.58 U1.61 U1.62 U1.68 U1.69 U1.71 U1.72 U1.90 U1.91 U1.92 U1.93 U1.94 U1.95 U1.96 U1.122 U202.3 U202.4 U202.5 U202.6 U202.11 U202.12 U202.13 U202.14 U204.14 U204.17 U204.19 U204.25 U204.43 U204.50 U204.53

## Polygon pours and split planes (outlines as drawn)
GND on Bottom Layer "GND_L02_P002" (solid, remove dead copper, pour order 2): -2.667,86.741 120.65,86.741 120.777,86.868 120.904,86.741 120.904,-2.159 -3.175,-2.159
GND on Top Layer "GND_L01_P000" (solid, remove dead copper, pour order 0): -3.175,86.893 120.142,86.893 120.269,87.02 120.396,86.893 120.396,-2.007 -3.683,-2.007

## Keep-outs
Keep-Out Layer:
  the board outline again, w0.203

## Silkscreen, mask and mechanical layers (free items; w line width, h text height)
Top Overlay:
  lines w0.178: 15.494,52.324 18.923,52.324 21.082,52.324 22.225,53.467 ; 22.225,52.705 22.225,54.864 ; 26.67,64.77 28.829,64.77 ; 27.813,60.833 27.813,62.103 27.813,63.5 27.94,63.627 27.94,64.77 ; 28.321,47.371 29.083,47.371 ; 28.702,50.546 28.702,51.054 ; 28.702,51.689 28.702,51.054 ; 28.758,47.427 29.21,47.879 29.21,50.546 28.702,51.054
  text "EMIA_20210812_V1.0" at 64.897,6.985 h1.02